# EAGLE board day0_Abdul Gani_18315033.brd (EAGLE 7.4.0)
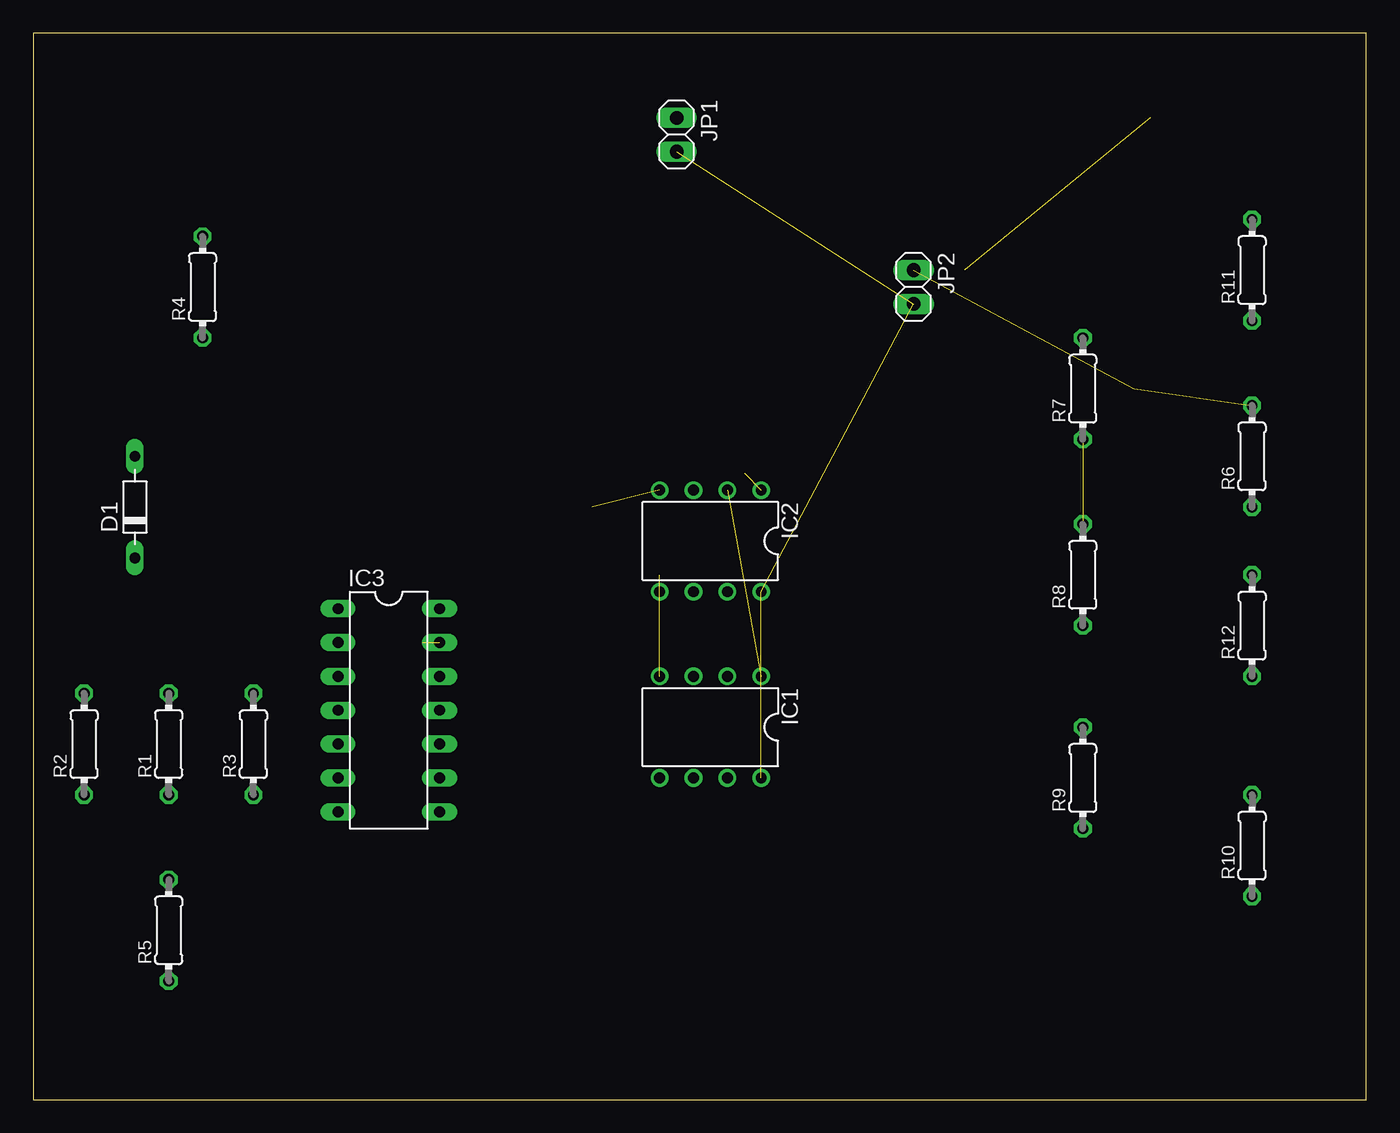
[diagram p0: board, top side]
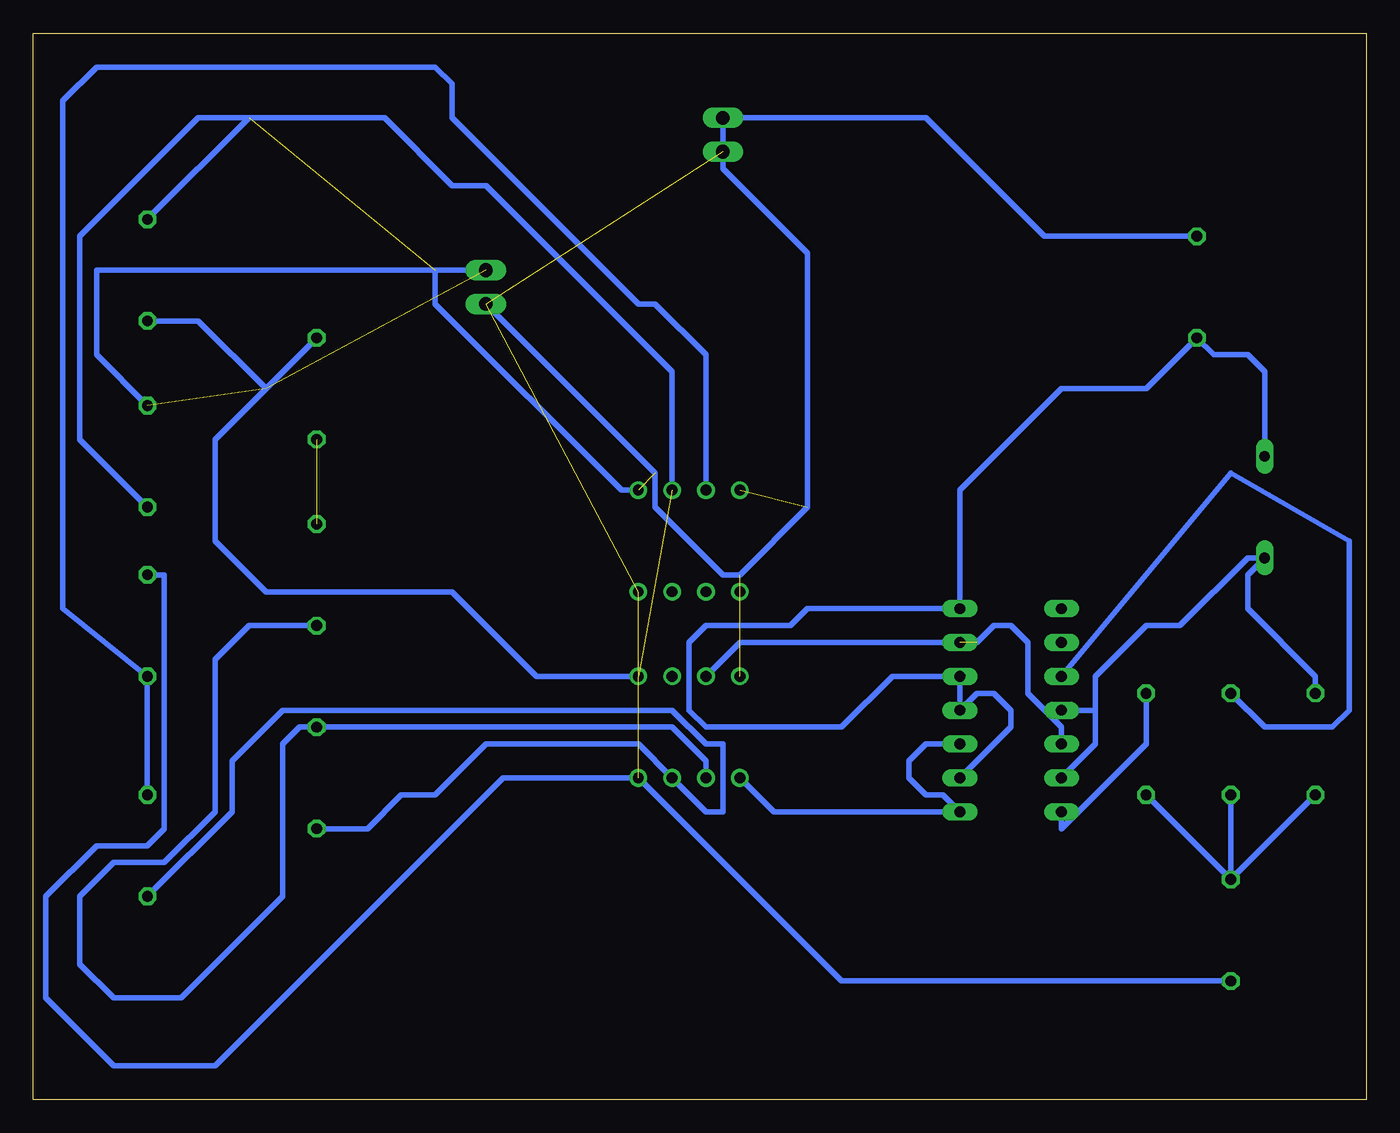
[diagram p1: board, bottom side, seen from below]

Size 100 x 80 mm. Coordinates in mm from the lower left corner, seen from the top.
Outline: 0,0 100,0 100,80 0,80 0,0
Copper layers (1*16): Top 0.035mm / dielectric 1.5mm / Bottom 0.035mm
Design rules "default": minimum track width 10mil, minimum drill 24mil, track to track 8mil, track to pad 8mil, pad to pad 8mil, via to via 8mil, smd to smd 8mil, copper to edge 40mil, drill to drill 8mil, minimum pad ring 10mil, minimum via ring 8mil, stop-mask expansion 4mil, vias tented up to drill 0mil, thermal gap 10mil

## Footprints (pad centres in the part's own frame; a part is rotated, then mirrored left to right if it is on the bottom)
D-7.5 = drill 0.813 long: A 3.81,0; C -3.81,0
DIL08 = drill 0.813 pad 1.27: 1 -3.81,-3.81; 2 -1.27,-3.81; 3 1.27,-3.81; 4 3.81,-3.81; 5 3.81,3.81; 6 1.27,3.81; 7 -1.27,3.81; 8 -3.81,3.81
DIL14 = drill 0.813 long: 1 -7.62,-3.81; 2 -5.08,-3.81; 3 -2.54,-3.81; 4 0,-3.81; 5 2.54,-3.81; 6 5.08,-3.81; 7 7.62,-3.81; 8 7.62,3.81; 9 5.08,3.81; 10 2.54,3.81; 11 0,3.81; 12 -2.54,3.81; 13 -5.08,3.81; 14 -7.62,3.81
1X02 = drill 1.016 long: 1 -1.27,0; 2 1.27,0
0204/7 = drill 0.813 octagon: 1 -3.81,0; 2 3.81,0

## Placement (x,y rotation side)
D1  [D-7.5]  7.62,44.45 90 top
IC1  LM358N  [DIL08]  50.8,27.94 180 top
IC2  LM358N  [DIL08]  50.8,41.91 180 top
IC3  [DIL14]  26.67,29.21 270 top
JP1  [1X02]  48.26,72.39 270 top
JP2  [1X02]  66.04,60.96 270 top
R1  100k  [0204/7]  10.16,26.67 90 top
R2  12k  [0204/7]  3.81,26.67 90 top
R3  200k  [0204/7]  16.51,26.67 90 top
R4  60k  [0204/7]  12.7,60.96 90 top
R5  60k  [0204/7]  10.16,12.7 90 top
R6  100k  [0204/7]  91.44,48.26 90 top
R7  100k  [0204/7]  78.74,53.34 90 top
R8  1k  [0204/7]  78.74,39.37 90 top
R9  100k  [0204/7]  78.74,24.13 90 top
R10  100k  [0204/7]  91.44,19.05 90 top
R11  100k  [0204/7]  91.44,62.23 90 top
R12  100k  [0204/7]  91.44,35.56 90 top

## Library data of the parts
D1 = diode
IC1 IC2 = linear
IC3 = ic-package
JP1 JP2 = pinhead
R1-R12 = rcl

## Nets
GND: IC1.8 IC2.8 JP1.2 JP2.2 R5.1 R12.2
N$1: R1.1 R2.1 R3.1 R5.2
N$2: R7.1 R8.2
N$3: IC1.6 R8.1 R9.2
N$4: IC1.1 R6.1 R7.2
N$5: D1.C IC3.4 IC3.6 R2.2
N$6: IC3.7 R3.2
N$7: IC3.3 R1.2
N$9: D1.A IC3.9 IC3.11 IC3.12 IC3.14 R4.1
N$10: IC1.5 IC3.8 IC3.10
N$11: IC1.3 IC3.5 IC3.13
N$15: IC1.7 R9.1 R10.1
N$16: IC2.2 R6.2 R11.1
N$17: IC2.3 R10.2 R12.1
N$18: IC1.2
VCC: IC1.4 IC2.1 IC2.4 JP1.1 JP2.1 R4.2 R11.2

## Tracks (layer width: path | path; a pad name or v marks a point on that pad's centre or on a via)
GND  (3 unrouted)
  Bottom 0.406: R5.1 39.37,8.89 IC1.8 64.77,24.13 86.36,2.54 93.98,2.54 99.06,7.62 99.06,15.24 95.25,19.05 91.44,19.05 90.17,20.32 90.17,39.37 R12.2
N$1
  Bottom 0.406: R2.1 R5.2 | R5.2 R3.1 | R5.2 R1.1
N$2  (1 unrouted)
N$3
  Bottom 0.406: IC1.6 49.53,25.4 52.07,27.94 R9.2 80.01,27.94 81.28,26.67 81.28,15.24 88.9,7.62 93.98,7.62 96.52,10.16 96.52,15.24 93.98,17.78 90.17,17.78 86.36,21.59 86.36,33.02 83.82,35.56 R8.1
N$4  (1 unrouted)
  Bottom 0.406: IC1.1 62.23,31.75 68.58,38.1 82.55,38.1 86.36,41.91 86.36,49.53 R7.2 | R6.1 96.52,49.53 96.52,64.77 87.63,73.66 73.66,73.66 68.58,68.58 66.04,68.58 52.07,54.61 52.07,45.72
N$5
  Bottom 0.406: R2.2 3.81,31.75 8.89,36.83 8.89,39.37 D1.C 8.89,40.64 13.97,35.56 16.51,35.56 20.32,31.75 20.32,29.21 | 20.32,29.21 IC3.4 | IC3.6 20.32,26.67 20.32,29.21
N$6
  Bottom 0.406: R3.2 16.51,26.67 22.86,20.32 IC3.7
N$7
  Bottom 0.406: IC3.3 10.16,46.99 1.27,41.91 1.27,29.21 2.54,27.94 7.62,27.94 R1.2
N$9
  Bottom 0.406: IC3.9 26.67,27.94 26.67,29.21 27.94,30.48 29.21,30.48 IC3.11 IC3.12 35.56,31.75 39.37,27.94 49.53,27.94 50.8,29.21 50.8,34.29 49.53,35.56 43.18,35.56 41.91,36.83 IC3.14 30.48,45.72 22.86,53.34 16.51,53.34 R4.1 11.43,55.88 8.89,55.88 7.62,54.61 D1.A
N$10
  Bottom 0.406: IC3.10 33.02,26.67 34.29,25.4 34.29,24.13 33.02,22.86 31.75,22.86 IC3.8 44.45,21.59 IC1.5
N$11  (1 unrouted)
  Bottom 0.406: IC3.5 22.86,27.94 25.4,30.48 25.4,34.29 26.67,35.56 27.94,35.56 29.21,34.29 | IC3.13 46.99,34.29 IC1.3
N$15
  Bottom 0.406: R10.1 85.09,21.59 85.09,25.4 81.28,29.21 52.07,29.21 49.53,26.67 48.26,26.67 48.26,21.59 49.53,21.59 IC1.7 54.61,26.67 66.04,26.67 69.85,22.86 72.39,22.86 74.93,20.32 R9.1
N$16  (2 unrouted)
  Bottom 0.406: R11.1 87.63,58.42 82.55,53.34 | R6.2 95.25,55.88 95.25,62.23 66.04,62.23
N$17
  Bottom 0.406: IC2.3 49.53,55.88 53.34,59.69 54.61,59.69 68.58,73.66 68.58,76.2 69.85,77.47 95.25,77.47 97.79,74.93 97.79,36.83 R12.1 R10.2
VCC  (4 unrouted)
  Bottom 0.406: R4.2 24.13,64.77 33.02,73.66 JP1.1 48.26,69.85 41.91,63.5 41.91,44.45 46.99,39.37 48.26,39.37 53.34,44.45 53.34,46.99 66.04,59.69 | IC2.1 55.88,45.72 69.85,59.69 69.85,62.23 JP2.1 | R11.2 83.82,73.66